# Altium PCB PCB1.PcbDoc
Units mm, origin at the board's own origin, x right, y up, seen from the top; angles counter-clockwise.
Board outline 192 x 86 mm, 2 copper layers (Top Layer, Bottom Layer), stack 1.671 mm thick; 30 components, 57 nets, 300 pads, 0 vias.
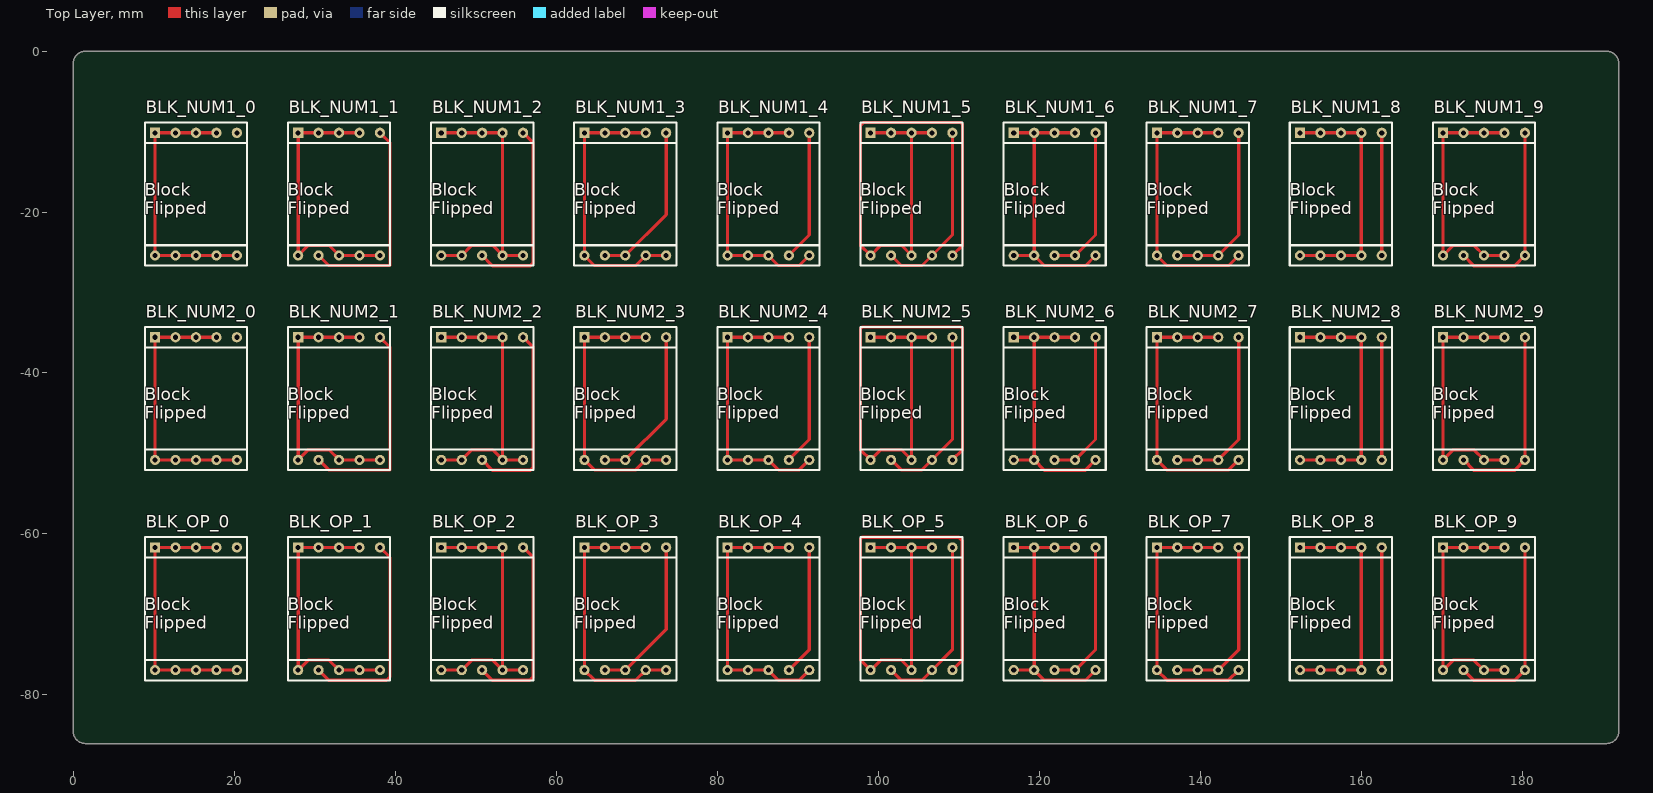
[diagram p0: Top Layer view]
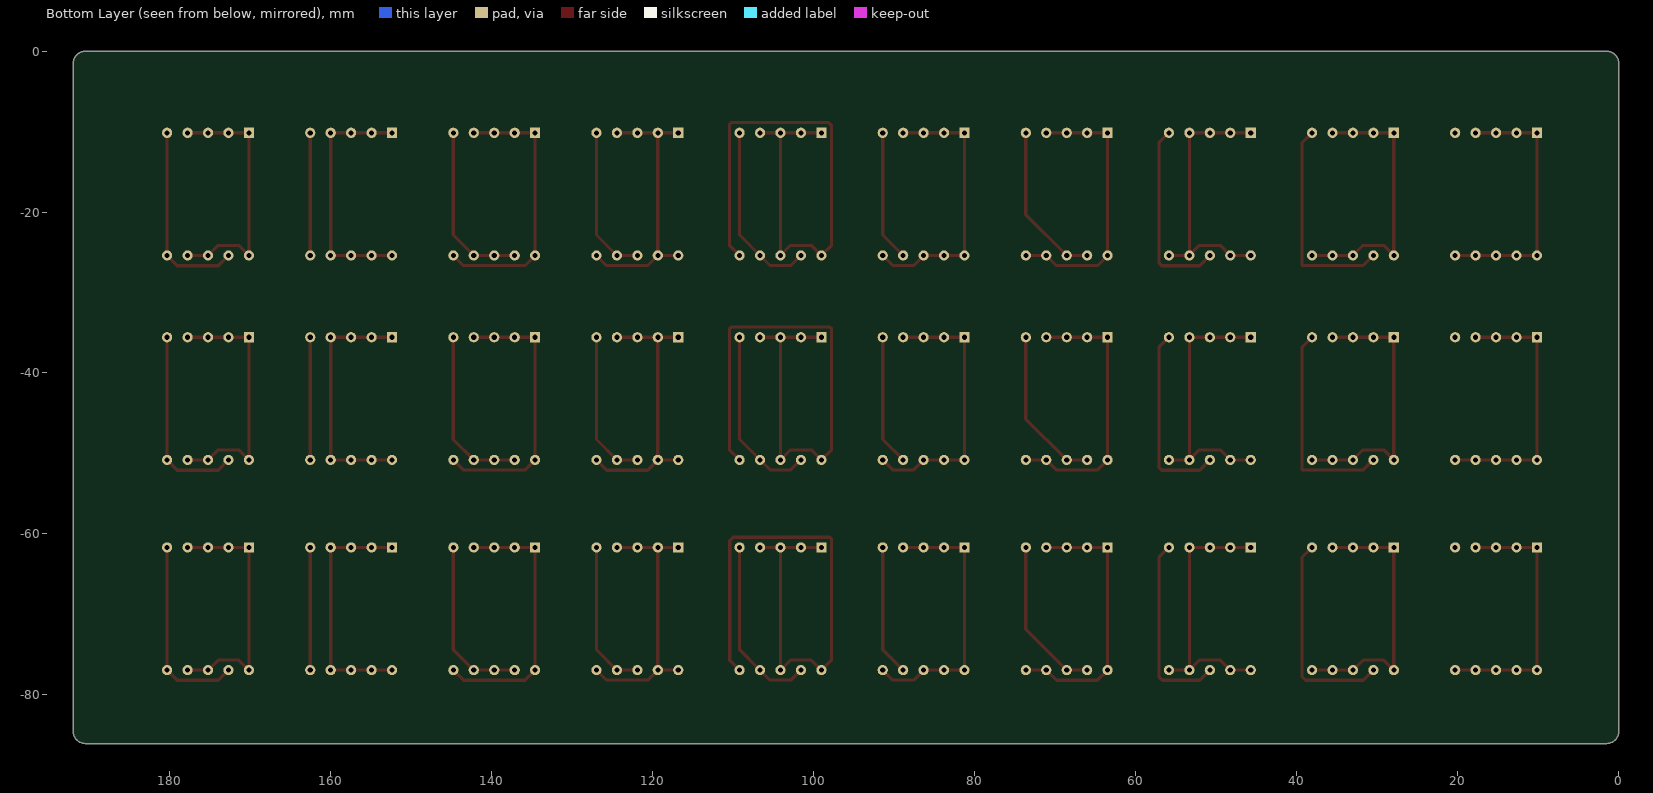
[diagram p1: Bottom Layer view, seen from below]

## Layer stack, top to bottom
Top Solder: solder mask 0.0102, Solder Resist, Dk 3.5
Top Layer: signal copper 0.0356
Dielectric 1: dielectric 1.6, FR-4, Dk 4.8
Bottom Layer: signal copper 0.0356
Bottom Solder: solder mask 0.0102, Solder Resist, Dk 3.5

## Board outline
0,-84.53 0,-1.53 cw(c1.5,-1.53) 1.5,-0.03 190.5,-0.03 cw(c190.5,-1.53) 192,-1.53 192,-84.53 cw(c190.5,-84.53) 190.5,-86.03 1.5,-86.03 cw(c1.5,-84.53)

## Design rules (kind name [scope] priority, off if disabled: settings)
Clearance [All] p1: gap=0.4 ignorepadtopadclearanceinfootprint=FALSE
PolygonConnect [All] p1: connectstyle=Relief reliefconductorwidth=0.254 reliefentries=4 polygonreliefangle="90 Angle" airgapwidth=0.254
RoutingLayers [All] p1: top layer_v5=TRUE bottom layer_v5=FALSE
RoutingVias [All] p1: holewidth=0.9 width=1.2 viastyle="Through Hole" minholewidth=0.9 minwidth=1.2 maxholewidth=0.9 maxwidth=1.2
SolderMaskExpansion [All] p1: expansion=0.102 istentingtop=FALSE
UnRoutedNet [All] p1: checkbadconnections=TRUE
Width [All] p1: maxlimit=0.4 minlimit=0.4 preferedwidth=0.4
28 further rules are at their usual default settings.

## Components (designator, comment, footprint, x,y, rotation, side; value= is the part's Value field where it differs from the comment)
BLK_NUM1_0 "6x5 Block" Block_6x5 15.24,-10.16 r0 top
BLK_NUM1_1 "6x5 Block" Block_6x5 33.02,-10.16 r0 top
BLK_NUM1_2 "6x5 Block" Block_6x5 50.8,-10.16 r0 top
BLK_NUM1_3 "6x5 Block" Block_6x5 68.58,-10.16 r0 top
BLK_NUM1_4 "6x5 Block" Block_6x5 86.36,-10.16 r0 top
BLK_NUM1_5 "6x5 Block" Block_6x5 104.14,-10.16 r0 top
BLK_NUM1_6 "6x5 Block" Block_6x5 121.92,-10.16 r0 top
BLK_NUM1_7 "6x5 Block" Block_6x5 139.7,-10.16 r0 top
BLK_NUM1_8 "6x5 Block" Block_6x5 157.48,-10.16 r0 top
BLK_NUM1_9 "6x5 Block" Block_6x5 175.26,-10.16 r0 top
BLK_NUM2_0 "6x5 Block" Block_6x5 15.24,-35.56 r0 top
BLK_NUM2_1 "6x5 Block" Block_6x5 33.02,-35.56 r0 top
BLK_NUM2_2 "6x5 Block" Block_6x5 50.8,-35.56 r0 top
BLK_NUM2_3 "6x5 Block" Block_6x5 68.58,-35.56 r0 top
BLK_NUM2_4 "6x5 Block" Block_6x5 86.36,-35.56 r0 top
BLK_NUM2_5 "6x5 Block" Block_6x5 104.14,-35.56 r0 top
BLK_NUM2_6 "6x5 Block" Block_6x5 121.92,-35.56 r0 top
BLK_NUM2_7 "6x5 Block" Block_6x5 139.7,-35.56 r0 top
BLK_NUM2_8 "6x5 Block" Block_6x5 157.48,-35.56 r0 top
BLK_NUM2_9 "6x5 Block" Block_6x5 175.26,-35.56 r0 top
BLK_OP_0 "6x5 Block" Block_6x5 15.24,-61.67 r0 top
BLK_OP_1 "6x5 Block" Block_6x5 33.02,-61.67 r0 top
BLK_OP_2 "6x5 Block" Block_6x5 50.8,-61.67 r0 top
BLK_OP_3 "6x5 Block" Block_6x5 68.58,-61.67 r0 top
BLK_OP_4 "6x5 Block" Block_6x5 86.36,-61.67 r0 top
BLK_OP_5 "6x5 Block" Block_6x5 104.14,-61.67 r0 top
BLK_OP_6 "6x5 Block" Block_6x5 121.92,-61.67 r0 top
BLK_OP_7 "6x5 Block" Block_6x5 139.7,-61.67 r0 top
BLK_OP_8 "6x5 Block" Block_6x5 157.48,-61.67 r0 top
BLK_OP_9 "6x5 Block" Block_6x5 175.26,-61.67 r0 top

## Footprints (in the part's own frame and the unit in brackets; to place one, negate y for a bottom-side part, rotate by r counter-clockwise, add the part's x,y. Pads: shape width x height; smd on the part's side, far side on the other; paste and mask are expansions set on the pad)
Block_6x5 [mil]
  rect 50x50 hole 25: 1(-200,0)
  round 50 hole 25: 2(-100,0) 3(0,0) 4(100,0) 5(200,0) 6(200,-600) 7(100,-600) 8(0,-600) 9(-100,-600) 10(-200,-600)
  silkscreen extent -250,-650 250,50

## Part data
BLK_NUM1_0 BLK_NUM1_1 BLK_NUM1_2 BLK_NUM1_3 BLK_NUM1_4 BLK_NUM1_5 BLK_NUM1_6 BLK_NUM1_7 BLK_NUM1_8 BLK_NUM1_9 BLK_NUM2_0 BLK_NUM2_1 BLK_NUM2_2 BLK_NUM2_3 BLK_NUM2_4 BLK_NUM2_5 BLK_NUM2_6 BLK_NUM2_7 BLK_NUM2_8 BLK_NUM2_9 BLK_OP_0 BLK_OP_1 BLK_OP_2 BLK_OP_3 BLK_OP_4 BLK_OP_5 BLK_OP_6 BLK_OP_7 BLK_OP_8 BLK_OP_9: library part Block_6x5

## Nets (pads, with @x,y where several pads share a name; then routed paths per layer and width w, separated by ;. In a path a pad name is that pad's centre, name@x,y a point inside that pad or via, vN(x,y) a via of type N, cw(c..) or ccw(c..) an arc to the next point about the centre after c; other vN are vias at no path point)
NetBLK_NUM1_0_1: BLK_NUM1_0.1 BLK_NUM1_0.2 BLK_NUM1_0.3 BLK_NUM1_0.4 BLK_NUM1_0.6 BLK_NUM1_0.7 BLK_NUM1_0.8 BLK_NUM1_0.9 BLK_NUM1_0.10 | length 33
  Top Layer w0.4: BLK_NUM1_0.4 BLK_NUM1_0.3 BLK_NUM1_0.2 BLK_NUM1_0.1 BLK_NUM1_0.10 BLK_NUM1_0.9 BLK_NUM1_0.8 BLK_NUM1_0.7 BLK_NUM1_0.6
NetBLK_NUM1_1_1: BLK_NUM1_1.1 BLK_NUM1_1.2 BLK_NUM1_1.3 BLK_NUM1_1.4 BLK_NUM1_1.6 BLK_NUM1_1.7 BLK_NUM1_1.8 BLK_NUM1_1.10 | length 34.1
  Top Layer w0.4: BLK_NUM1_1.4 BLK_NUM1_1.3 BLK_NUM1_1.2 BLK_NUM1_1.1 BLK_NUM1_1.10 29.189,-24.151 31.771,-24.151 BLK_NUM1_1.8 BLK_NUM1_1.7 BLK_NUM1_1.6
NetBLK_NUM1_1_5: BLK_NUM1_1.5 BLK_NUM1_1.9 | length 26.4
  Top Layer w0.4: BLK_NUM1_1.9 31.72,-26.64 39.345,-26.64 39.345,-11.405 BLK_NUM1_1.5
NetBLK_NUM1_2_1: BLK_NUM1_2.1 BLK_NUM1_2.2 BLK_NUM1_2.3 BLK_NUM1_2.4 BLK_NUM1_2.6 BLK_NUM1_2.7 BLK_NUM1_2.9 BLK_NUM1_2.10 | length 34.1
  Top Layer w0.4: BLK_NUM1_2.10 BLK_NUM1_2.9 49.509,-24.151 52.091,-24.151 BLK_NUM1_2.7 ; BLK_NUM1_2.1 BLK_NUM1_2.2 BLK_NUM1_2.3 BLK_NUM1_2.4 BLK_NUM1_2.7 ; BLK_NUM1_2.6 BLK_NUM1_2.7
NetBLK_NUM1_2_5: BLK_NUM1_2.5 BLK_NUM1_2.8 | length 23.7
  Top Layer w0.4: BLK_NUM1_2.8 52.07,-26.67 56.765,-26.67 57.125,-26.31 57.125,-11.405 BLK_NUM1_2.5
NetBLK_NUM1_3_1: BLK_NUM1_3.1 BLK_NUM1_3.2 BLK_NUM1_3.3 BLK_NUM1_3.4 BLK_NUM1_3.6 BLK_NUM1_3.7 BLK_NUM1_3.10 | length 34
  Top Layer w0.4: BLK_NUM1_3.4 BLK_NUM1_3.3 BLK_NUM1_3.2 BLK_NUM1_3.1 BLK_NUM1_3.10 64.74,-26.64 69.88,-26.64 BLK_NUM1_3.7 BLK_NUM1_3.6
NetBLK_NUM1_3_5: BLK_NUM1_3.5 BLK_NUM1_3.8 BLK_NUM1_3.9 | length 19.9
  Top Layer w0.4: BLK_NUM1_3.9 BLK_NUM1_3.8 73.66,-20.32 BLK_NUM1_3.5
NetBLK_NUM1_4_1: BLK_NUM1_4.1 BLK_NUM1_4.2 BLK_NUM1_4.3 BLK_NUM1_4.4 BLK_NUM1_4.6 BLK_NUM1_4.8 BLK_NUM1_4.9 BLK_NUM1_4.10 | length 34
  Top Layer w0.4: BLK_NUM1_4.4 BLK_NUM1_4.3 BLK_NUM1_4.2 BLK_NUM1_4.1 BLK_NUM1_4.10 BLK_NUM1_4.9 BLK_NUM1_4.8 87.6,-26.64 90.2,-26.64 BLK_NUM1_4.6
NetBLK_NUM1_4_5: BLK_NUM1_4.5 BLK_NUM1_4.7 | length 16.3
  Top Layer w0.4: BLK_NUM1_4.7 91.44,-22.86 BLK_NUM1_4.5
NetBLK_NUM1_5_1: BLK_NUM1_5.1 BLK_NUM1_5.2 BLK_NUM1_5.3 BLK_NUM1_5.4 BLK_NUM1_5.6 BLK_NUM1_5.8 BLK_NUM1_5.10 | length 75.4
  Top Layer w0.4: BLK_NUM1_5.1 BLK_NUM1_5.2 BLK_NUM1_5.3 ; BLK_NUM1_5.4 BLK_NUM1_5.3 ; BLK_NUM1_5.6 110.49,-24.13 110.49,-9.124 110.256,-8.89 98.161,-8.89 97.79,-9.261 97.79,-24.13 BLK_NUM1_5.10 100.309,-24.151 102.891,-24.151 BLK_NUM1_5.8 BLK_NUM1_5.3
NetBLK_NUM1_5_5: BLK_NUM1_5.5 BLK_NUM1_5.7 BLK_NUM1_5.9 | length 22.4
  Top Layer w0.4: BLK_NUM1_5.9 102.84,-26.64 105.44,-26.64 BLK_NUM1_5.7 109.22,-22.86 BLK_NUM1_5.5
NetBLK_NUM1_6_1: BLK_NUM1_6.1 BLK_NUM1_6.2 BLK_NUM1_6.3 BLK_NUM1_6.4 BLK_NUM1_6.6 BLK_NUM1_6.9 BLK_NUM1_6.10 | length 34
  Top Layer w0.4: BLK_NUM1_6.10 BLK_NUM1_6.9 ; BLK_NUM1_6.1 BLK_NUM1_6.2 ; BLK_NUM1_6.4 BLK_NUM1_6.3 BLK_NUM1_6.2 ; BLK_NUM1_6.6 125.76,-26.64 120.62,-26.64 BLK_NUM1_6.9 ; BLK_NUM1_6.9 BLK_NUM1_6.2
NetBLK_NUM1_6_5: BLK_NUM1_6.5 BLK_NUM1_6.7 BLK_NUM1_6.8 | length 18.8
  Top Layer w0.4: BLK_NUM1_6.8 BLK_NUM1_6.7 127,-22.86 BLK_NUM1_6.5
NetBLK_NUM1_7_1: BLK_NUM1_7.1 BLK_NUM1_7.2 BLK_NUM1_7.3 BLK_NUM1_7.4 BLK_NUM1_7.6 BLK_NUM1_7.10 | length 34
  Top Layer w0.4: BLK_NUM1_7.4 BLK_NUM1_7.3 BLK_NUM1_7.2 BLK_NUM1_7.1 BLK_NUM1_7.10 135.86,-26.64 143.54,-26.64 BLK_NUM1_7.6
NetBLK_NUM1_7_5: BLK_NUM1_7.5 BLK_NUM1_7.7 BLK_NUM1_7.8 BLK_NUM1_7.9 | length 21.4
  Top Layer w0.4: BLK_NUM1_7.9 BLK_NUM1_7.8 BLK_NUM1_7.7 144.78,-22.86 BLK_NUM1_7.5
NetBLK_NUM1_8_1: BLK_NUM1_8.1 BLK_NUM1_8.2 BLK_NUM1_8.3 BLK_NUM1_8.4 BLK_NUM1_8.7 BLK_NUM1_8.8 BLK_NUM1_8.9 BLK_NUM1_8.10 | length 30.5
  Top Layer w0.4: BLK_NUM1_8.10 BLK_NUM1_8.9 BLK_NUM1_8.8 BLK_NUM1_8.7 BLK_NUM1_8.4 BLK_NUM1_8.3 BLK_NUM1_8.2 BLK_NUM1_8.1
NetBLK_NUM1_8_5: BLK_NUM1_8.5 BLK_NUM1_8.6 | length 15.2
  Top Layer w0.4: BLK_NUM1_8.6 BLK_NUM1_8.5
NetBLK_NUM1_9_1: BLK_NUM1_9.1 BLK_NUM1_9.2 BLK_NUM1_9.3 BLK_NUM1_9.4 BLK_NUM1_9.7 BLK_NUM1_9.8 BLK_NUM1_9.10 | length 31.5
  Top Layer w0.4: BLK_NUM1_9.7 BLK_NUM1_9.8 174.011,-24.151 171.429,-24.151 BLK_NUM1_9.10 BLK_NUM1_9.1 BLK_NUM1_9.2 BLK_NUM1_9.3 BLK_NUM1_9.4
NetBLK_NUM1_9_5: BLK_NUM1_9.5 BLK_NUM1_9.6 BLK_NUM1_9.9 | length 23.9
  Top Layer w0.4: BLK_NUM1_9.9 173.99,-26.67 179.07,-26.67 BLK_NUM1_9.6 BLK_NUM1_9.5
NetBLK_NUM2_0_1: BLK_NUM2_0.1 BLK_NUM2_0.2 BLK_NUM2_0.3 BLK_NUM2_0.4 BLK_NUM2_0.6 BLK_NUM2_0.7 BLK_NUM2_0.8 BLK_NUM2_0.9 BLK_NUM2_0.10 | length 33
  Top Layer w0.4: BLK_NUM2_0.4 BLK_NUM2_0.3 BLK_NUM2_0.2 BLK_NUM2_0.1 BLK_NUM2_0.10 BLK_NUM2_0.9 BLK_NUM2_0.8 BLK_NUM2_0.7 BLK_NUM2_0.6
NetBLK_NUM2_1_1: BLK_NUM2_1.1 BLK_NUM2_1.2 BLK_NUM2_1.3 BLK_NUM2_1.4 BLK_NUM2_1.6 BLK_NUM2_1.7 BLK_NUM2_1.8 BLK_NUM2_1.10 | length 34.1
  Top Layer w0.4: BLK_NUM2_1.4 BLK_NUM2_1.3 BLK_NUM2_1.2 BLK_NUM2_1.1 BLK_NUM2_1.10 29.189,-49.551 31.771,-49.551 BLK_NUM2_1.8 BLK_NUM2_1.7 BLK_NUM2_1.6
NetBLK_NUM2_1_5: BLK_NUM2_1.5 BLK_NUM2_1.9 | length 26.4
  Top Layer w0.4: BLK_NUM2_1.9 31.72,-52.04 39.345,-52.04 39.345,-36.805 BLK_NUM2_1.5
NetBLK_NUM2_2_1: BLK_NUM2_2.1 BLK_NUM2_2.2 BLK_NUM2_2.3 BLK_NUM2_2.4 BLK_NUM2_2.6 BLK_NUM2_2.7 BLK_NUM2_2.9 BLK_NUM2_2.10 | length 34.1
  Top Layer w0.4: BLK_NUM2_2.10 BLK_NUM2_2.9 49.509,-49.551 52.091,-49.551 BLK_NUM2_2.7 ; BLK_NUM2_2.1 BLK_NUM2_2.2 BLK_NUM2_2.3 BLK_NUM2_2.4 BLK_NUM2_2.7 ; BLK_NUM2_2.6 BLK_NUM2_2.7
NetBLK_NUM2_2_5: BLK_NUM2_2.5 BLK_NUM2_2.8 | length 23.7
  Top Layer w0.4: BLK_NUM2_2.8 52.07,-52.07 56.765,-52.07 57.125,-51.71 57.125,-36.805 BLK_NUM2_2.5
NetBLK_NUM2_3_1: BLK_NUM2_3.1 BLK_NUM2_3.2 BLK_NUM2_3.3 BLK_NUM2_3.4 BLK_NUM2_3.6 BLK_NUM2_3.7 BLK_NUM2_3.10 | length 34
  Top Layer w0.4: BLK_NUM2_3.4 BLK_NUM2_3.3 BLK_NUM2_3.2 BLK_NUM2_3.1 BLK_NUM2_3.10 64.74,-52.04 69.88,-52.04 BLK_NUM2_3.7 BLK_NUM2_3.6
NetBLK_NUM2_3_5: BLK_NUM2_3.5 BLK_NUM2_3.8 BLK_NUM2_3.9 | length 19.9
  Top Layer w0.4: BLK_NUM2_3.9 BLK_NUM2_3.8 73.66,-45.72 BLK_NUM2_3.5
NetBLK_NUM2_4_1: BLK_NUM2_4.1 BLK_NUM2_4.2 BLK_NUM2_4.3 BLK_NUM2_4.4 BLK_NUM2_4.6 BLK_NUM2_4.8 BLK_NUM2_4.9 BLK_NUM2_4.10 | length 34
  Top Layer w0.4: BLK_NUM2_4.4 BLK_NUM2_4.3 BLK_NUM2_4.2 BLK_NUM2_4.1 BLK_NUM2_4.10 BLK_NUM2_4.9 BLK_NUM2_4.8 87.6,-52.04 90.2,-52.04 BLK_NUM2_4.6
NetBLK_NUM2_4_5: BLK_NUM2_4.5 BLK_NUM2_4.7 | length 16.3
  Top Layer w0.4: BLK_NUM2_4.7 91.44,-48.26 BLK_NUM2_4.5
NetBLK_NUM2_5_1: BLK_NUM2_5.1 BLK_NUM2_5.2 BLK_NUM2_5.3 BLK_NUM2_5.4 BLK_NUM2_5.6 BLK_NUM2_5.8 BLK_NUM2_5.10 | length 75.5
  Top Layer w0.4: BLK_NUM2_5.1 BLK_NUM2_5.2 BLK_NUM2_5.3 ; BLK_NUM2_5.4 BLK_NUM2_5.3 ; BLK_NUM2_5.6 110.49,-49.53 110.49,-34.524 110.256,-34.29 98.024,-34.29 97.79,-34.524 97.79,-49.53 BLK_NUM2_5.10 100.309,-49.551 102.891,-49.551 BLK_NUM2_5.8 BLK_NUM2_5.3
NetBLK_NUM2_5_5: BLK_NUM2_5.5 BLK_NUM2_5.7 BLK_NUM2_5.9 | length 22.4
  Top Layer w0.4: BLK_NUM2_5.9 102.84,-52.04 105.44,-52.04 BLK_NUM2_5.7 109.22,-48.26 BLK_NUM2_5.5
NetBLK_NUM2_6_1: BLK_NUM2_6.1 BLK_NUM2_6.2 BLK_NUM2_6.3 BLK_NUM2_6.4 BLK_NUM2_6.6 BLK_NUM2_6.9 BLK_NUM2_6.10 | length 34.1
  Top Layer w0.4: BLK_NUM2_6.10 BLK_NUM2_6.9 ; BLK_NUM2_6.1 BLK_NUM2_6.2 ; BLK_NUM2_6.4 BLK_NUM2_6.3 BLK_NUM2_6.2 ; BLK_NUM2_6.6 125.73,-52.07 120.65,-52.07 BLK_NUM2_6.9 ; BLK_NUM2_6.9 BLK_NUM2_6.2
NetBLK_NUM2_6_5: BLK_NUM2_6.5 BLK_NUM2_6.7 BLK_NUM2_6.8 | length 18.8
  Top Layer w0.4: BLK_NUM2_6.8 BLK_NUM2_6.7 127,-48.26 BLK_NUM2_6.5
NetBLK_NUM2_7_1: BLK_NUM2_7.1 BLK_NUM2_7.2 BLK_NUM2_7.3 BLK_NUM2_7.4 BLK_NUM2_7.6 BLK_NUM2_7.10 | length 34
  Top Layer w0.4: BLK_NUM2_7.4 BLK_NUM2_7.3 BLK_NUM2_7.2 BLK_NUM2_7.1 BLK_NUM2_7.10 135.86,-52.04 143.54,-52.04 BLK_NUM2_7.6
NetBLK_NUM2_7_5: BLK_NUM2_7.5 BLK_NUM2_7.7 BLK_NUM2_7.8 BLK_NUM2_7.9 | length 21.4
  Top Layer w0.4: BLK_NUM2_7.9 BLK_NUM2_7.8 BLK_NUM2_7.7 144.78,-48.26 BLK_NUM2_7.5
NetBLK_NUM2_8_1: BLK_NUM2_8.1 BLK_NUM2_8.2 BLK_NUM2_8.3 BLK_NUM2_8.4 BLK_NUM2_8.7 BLK_NUM2_8.8 BLK_NUM2_8.9 BLK_NUM2_8.10 | length 30.5
  Top Layer w0.4: BLK_NUM2_8.10 BLK_NUM2_8.9 BLK_NUM2_8.8 BLK_NUM2_8.7 BLK_NUM2_8.4 BLK_NUM2_8.3 BLK_NUM2_8.2 BLK_NUM2_8.1
NetBLK_NUM2_8_5: BLK_NUM2_8.5 BLK_NUM2_8.6 | length 15.2
  Top Layer w0.4: BLK_NUM2_8.6 BLK_NUM2_8.5
NetBLK_NUM2_9_1: BLK_NUM2_9.1 BLK_NUM2_9.2 BLK_NUM2_9.3 BLK_NUM2_9.4 BLK_NUM2_9.7 BLK_NUM2_9.8 BLK_NUM2_9.10 | length 31.5
  Top Layer w0.4: BLK_NUM2_9.7 BLK_NUM2_9.8 174.011,-49.551 171.429,-49.551 BLK_NUM2_9.10 BLK_NUM2_9.1 BLK_NUM2_9.2 BLK_NUM2_9.3 BLK_NUM2_9.4
NetBLK_NUM2_9_5: BLK_NUM2_9.5 BLK_NUM2_9.6 BLK_NUM2_9.9 | length 23.9
  Top Layer w0.4: BLK_NUM2_9.9 173.99,-52.07 179.07,-52.07 BLK_NUM2_9.6 BLK_NUM2_9.5
NetBLK_OP_0_1: BLK_OP_0.1 BLK_OP_0.2 BLK_OP_0.3 BLK_OP_0.4 BLK_OP_0.6 BLK_OP_0.7 BLK_OP_0.8 BLK_OP_0.9 BLK_OP_0.10 | length 33
  Top Layer w0.4: BLK_OP_0.4 BLK_OP_0.3 BLK_OP_0.2 BLK_OP_0.1 BLK_OP_0.10 BLK_OP_0.9 BLK_OP_0.8 BLK_OP_0.7 BLK_OP_0.6
NetBLK_OP_1_1: BLK_OP_1.1 BLK_OP_1.2 BLK_OP_1.3 BLK_OP_1.4 BLK_OP_1.6 BLK_OP_1.7 BLK_OP_1.8 BLK_OP_1.10 | length 34.1
  Top Layer w0.4: BLK_OP_1.4 BLK_OP_1.3 BLK_OP_1.2 BLK_OP_1.1 BLK_OP_1.10 29.188,-75.662 31.772,-75.662 BLK_OP_1.8 BLK_OP_1.7 BLK_OP_1.6
NetBLK_OP_1_5: BLK_OP_1.5 BLK_OP_1.9 | length 26.2
  Top Layer w0.4: BLK_OP_1.9 31.75,-78.18 38.91,-78.18 39.345,-77.745 39.345,-62.915 BLK_OP_1.5
NetBLK_OP_2_1: BLK_OP_2.1 BLK_OP_2.2 BLK_OP_2.3 BLK_OP_2.4 BLK_OP_2.6 BLK_OP_2.7 BLK_OP_2.9 BLK_OP_2.10 | length 34.1
  Top Layer w0.4: BLK_OP_2.10 BLK_OP_2.9 49.508,-75.662 52.092,-75.662 BLK_OP_2.7 ; BLK_OP_2.1 BLK_OP_2.2 BLK_OP_2.3 BLK_OP_2.4 BLK_OP_2.7 ; BLK_OP_2.6 BLK_OP_2.7
NetBLK_OP_2_5: BLK_OP_2.5 BLK_OP_2.8 | length 23.6
  Top Layer w0.4: BLK_OP_2.8 52.07,-78.18 56.69,-78.18 57.125,-77.745 57.125,-62.915 BLK_OP_2.5
NetBLK_OP_3_1: BLK_OP_3.1 BLK_OP_3.2 BLK_OP_3.3 BLK_OP_3.4 BLK_OP_3.6 BLK_OP_3.7 BLK_OP_3.10 | length 34.1
  Top Layer w0.4: BLK_OP_3.4 BLK_OP_3.3 BLK_OP_3.2 BLK_OP_3.1 BLK_OP_3.10 64.77,-78.18 69.85,-78.18 BLK_OP_3.7 BLK_OP_3.6
NetBLK_OP_3_5: BLK_OP_3.5 BLK_OP_3.8 BLK_OP_3.9 | length 19.9
  Top Layer w0.4: BLK_OP_3.9 BLK_OP_3.8 73.66,-71.83 BLK_OP_3.5
NetBLK_OP_4_1: BLK_OP_4.1 BLK_OP_4.2 BLK_OP_4.3 BLK_OP_4.4 BLK_OP_4.6 BLK_OP_4.8 BLK_OP_4.9 BLK_OP_4.10 | length 34
  Top Layer w0.4: BLK_OP_4.4 BLK_OP_4.3 BLK_OP_4.2 BLK_OP_4.1 BLK_OP_4.10 BLK_OP_4.9 BLK_OP_4.8 87.601,-78.151 90.199,-78.151 BLK_OP_4.6
NetBLK_OP_4_5: BLK_OP_4.5 BLK_OP_4.7 | length 16.3
  Top Layer w0.4: BLK_OP_4.7 91.44,-74.37 BLK_OP_4.5
NetBLK_OP_5_1: BLK_OP_5.1 BLK_OP_5.2 BLK_OP_5.3 BLK_OP_5.4 BLK_OP_5.6 BLK_OP_5.8 BLK_OP_5.10 | length 75.3
  Top Layer w0.4: BLK_OP_5.1 BLK_OP_5.2 BLK_OP_5.3 ; BLK_OP_5.4 BLK_OP_5.3 ; BLK_OP_5.6 110.455,-75.675 110.455,-60.832 110.023,-60.4 98.024,-60.4 97.79,-60.634 97.79,-75.64 BLK_OP_5.10 100.308,-75.662 102.892,-75.662 BLK_OP_5.8 BLK_OP_5.3
NetBLK_OP_5_5: BLK_OP_5.5 BLK_OP_5.7 BLK_OP_5.9 | length 22.4
  Top Layer w0.4: BLK_OP_5.9 102.841,-78.151 105.439,-78.151 BLK_OP_5.7 109.22,-74.37 BLK_OP_5.5
NetBLK_OP_6_1: BLK_OP_6.1 BLK_OP_6.2 BLK_OP_6.3 BLK_OP_6.4 BLK_OP_6.6 BLK_OP_6.9 BLK_OP_6.10 | length 34
  Top Layer w0.4: BLK_OP_6.10 BLK_OP_6.9 ; BLK_OP_6.1 BLK_OP_6.2 ; BLK_OP_6.4 BLK_OP_6.3 BLK_OP_6.2 ; BLK_OP_6.6 125.759,-78.151 120.621,-78.151 BLK_OP_6.9 ; BLK_OP_6.9 BLK_OP_6.2
NetBLK_OP_6_5: BLK_OP_6.5 BLK_OP_6.7 BLK_OP_6.8 | length 18.8
  Top Layer w0.4: BLK_OP_6.8 BLK_OP_6.7 127,-74.37 BLK_OP_6.5
NetBLK_OP_7_1: BLK_OP_7.1 BLK_OP_7.2 BLK_OP_7.3 BLK_OP_7.4 BLK_OP_7.6 BLK_OP_7.10 | length 34.1
  Top Layer w0.4: BLK_OP_7.4 BLK_OP_7.3 BLK_OP_7.2 BLK_OP_7.1 BLK_OP_7.10 135.89,-78.18 143.51,-78.18 BLK_OP_7.6
NetBLK_OP_7_5: BLK_OP_7.5 BLK_OP_7.7 BLK_OP_7.8 BLK_OP_7.9 | length 21.4
  Top Layer w0.4: BLK_OP_7.9 BLK_OP_7.8 BLK_OP_7.7 144.78,-74.37 BLK_OP_7.5
NetBLK_OP_8_1: BLK_OP_8.1 BLK_OP_8.2 BLK_OP_8.3 BLK_OP_8.4 BLK_OP_8.7 BLK_OP_8.8 BLK_OP_8.9 BLK_OP_8.10 | length 30.5
  Top Layer w0.4: BLK_OP_8.10 BLK_OP_8.9 BLK_OP_8.8 BLK_OP_8.7 BLK_OP_8.4 BLK_OP_8.3 BLK_OP_8.2 BLK_OP_8.1
NetBLK_OP_8_5: BLK_OP_8.5 BLK_OP_8.6 | length 15.2
  Top Layer w0.4: BLK_OP_8.6 BLK_OP_8.5
NetBLK_OP_9_1: BLK_OP_9.1 BLK_OP_9.2 BLK_OP_9.3 BLK_OP_9.4 BLK_OP_9.7 BLK_OP_9.8 BLK_OP_9.10 | length 31.5
  Top Layer w0.4: BLK_OP_9.7 BLK_OP_9.8 174.012,-75.662 171.428,-75.662 BLK_OP_9.10 BLK_OP_9.1 BLK_OP_9.2 BLK_OP_9.3 BLK_OP_9.4
NetBLK_OP_9_5: BLK_OP_9.5 BLK_OP_9.6 BLK_OP_9.9 | length 23.9
  Top Layer w0.4: BLK_OP_9.9 173.99,-78.18 179.07,-78.18 BLK_OP_9.6 BLK_OP_9.5
pads on no net: BLK_NUM1_0.5 BLK_NUM2_0.5 BLK_OP_0.5

## Polygon pours and split planes (outlines as drawn)
no net on Layer0 "Default Coverlay 1 Top" (split plane): 0,-0.03 192,-0.03 192,-86 0,-86
no net on Layer0 "Default Coverlay 1 Bottom" (split plane): 0,-0.03 192,-0.03 192,-86 0,-86

## Silkscreen, mask and mechanical layers (free items; w line width, h text height)
Mechanical 13:
  the board outline again, w0.254

## Text inside footprints (layer, text, board x,y; h text height)
BLK_NUM1_0: Top Overlay "Block / Flipped" at 8.89,-20.269 h1.52
BLK_NUM1_1: Top Overlay "Block / Flipped" at 26.67,-20.269 h1.52
BLK_NUM1_2: Top Overlay "Block / Flipped" at 44.45,-20.269 h1.52
BLK_NUM1_3: Top Overlay "Block / Flipped" at 62.23,-20.269 h1.52
BLK_NUM1_4: Top Overlay "Block / Flipped" at 80.01,-20.269 h1.52
BLK_NUM1_5: Top Overlay "Block / Flipped" at 97.79,-20.269 h1.52
BLK_NUM1_6: Top Overlay "Block / Flipped" at 115.57,-20.269 h1.52
BLK_NUM1_7: Top Overlay "Block / Flipped" at 133.35,-20.269 h1.52
BLK_NUM1_8: Top Overlay "Block / Flipped" at 151.13,-20.269 h1.52
BLK_NUM1_9: Top Overlay "Block / Flipped" at 168.91,-20.269 h1.52
BLK_NUM2_0: Top Overlay "Block / Flipped" at 8.89,-45.669 h1.52
BLK_NUM2_1: Top Overlay "Block / Flipped" at 26.67,-45.669 h1.52
BLK_NUM2_2: Top Overlay "Block / Flipped" at 44.45,-45.669 h1.52
BLK_NUM2_3: Top Overlay "Block / Flipped" at 62.23,-45.669 h1.52
BLK_NUM2_4: Top Overlay "Block / Flipped" at 80.01,-45.669 h1.52
BLK_NUM2_5: Top Overlay "Block / Flipped" at 97.79,-45.669 h1.52
BLK_NUM2_6: Top Overlay "Block / Flipped" at 115.57,-45.669 h1.52
BLK_NUM2_7: Top Overlay "Block / Flipped" at 133.35,-45.669 h1.52
BLK_NUM2_8: Top Overlay "Block / Flipped" at 151.13,-45.669 h1.52
BLK_NUM2_9: Top Overlay "Block / Flipped" at 168.91,-45.669 h1.52
BLK_OP_0: Top Overlay "Block / Flipped" at 8.89,-71.779 h1.52
BLK_OP_1: Top Overlay "Block / Flipped" at 26.67,-71.779 h1.52
BLK_OP_2: Top Overlay "Block / Flipped" at 44.45,-71.779 h1.52
BLK_OP_3: Top Overlay "Block / Flipped" at 62.23,-71.779 h1.52
BLK_OP_4: Top Overlay "Block / Flipped" at 80.01,-71.779 h1.52
BLK_OP_5: Top Overlay "Block / Flipped" at 97.79,-71.779 h1.52
BLK_OP_6: Top Overlay "Block / Flipped" at 115.57,-71.779 h1.52
BLK_OP_7: Top Overlay "Block / Flipped" at 133.35,-71.779 h1.52
BLK_OP_8: Top Overlay "Block / Flipped" at 151.13,-71.779 h1.52
BLK_OP_9: Top Overlay "Block / Flipped" at 168.91,-71.779 h1.52